# EAGLE board proiect 2025 v45 (EAGLE 9.7.0)
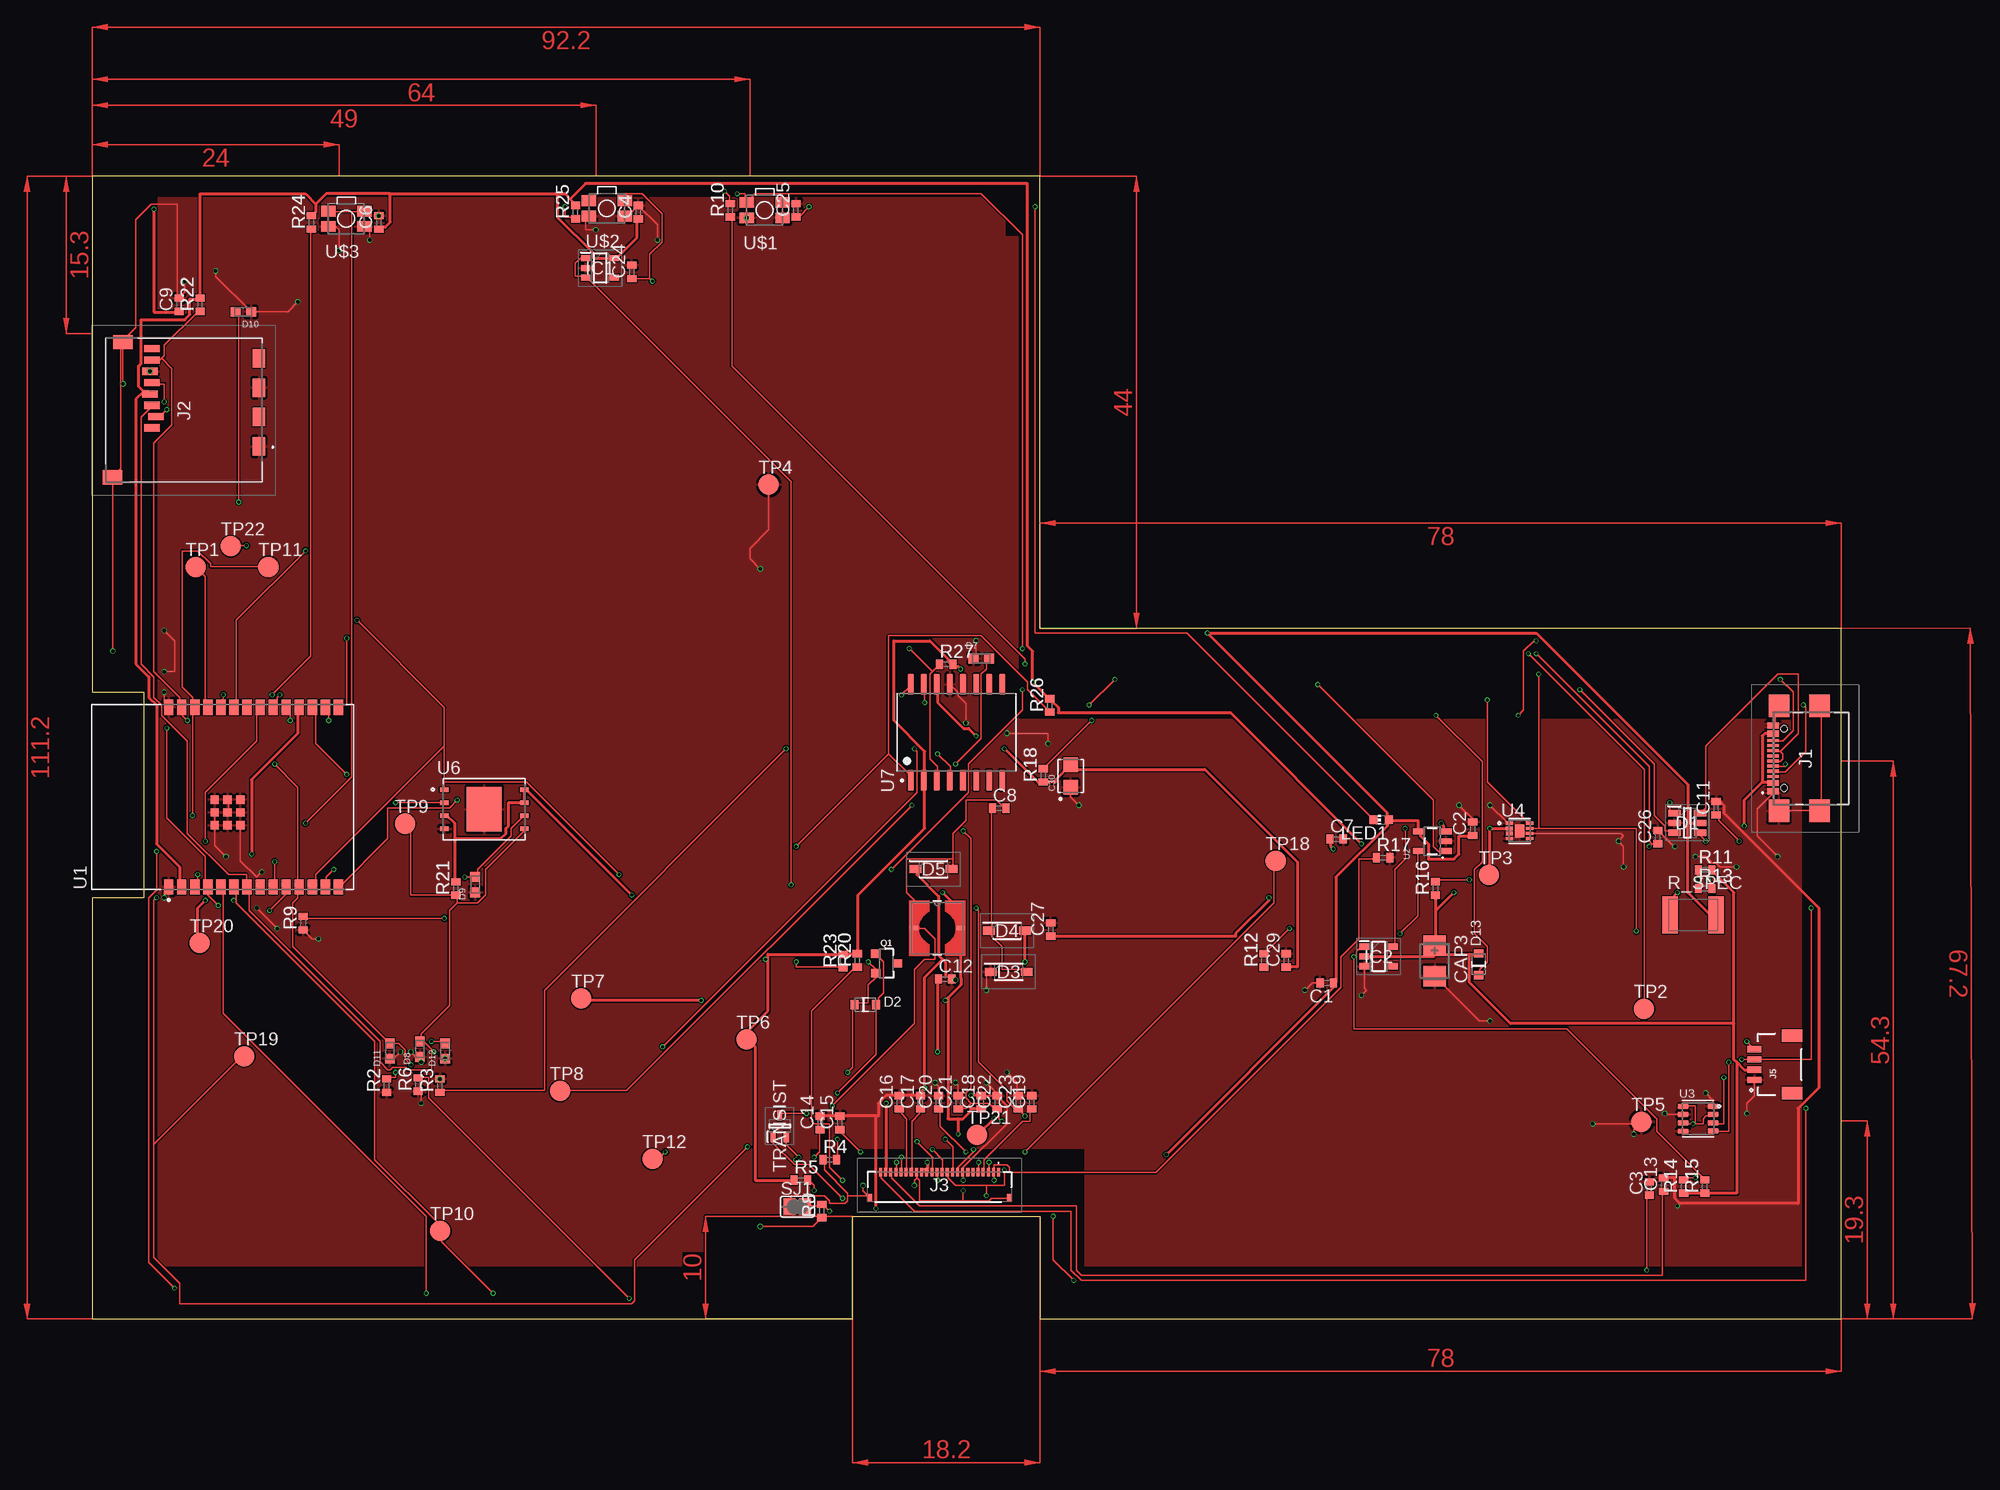
[diagram p0: board, top side]
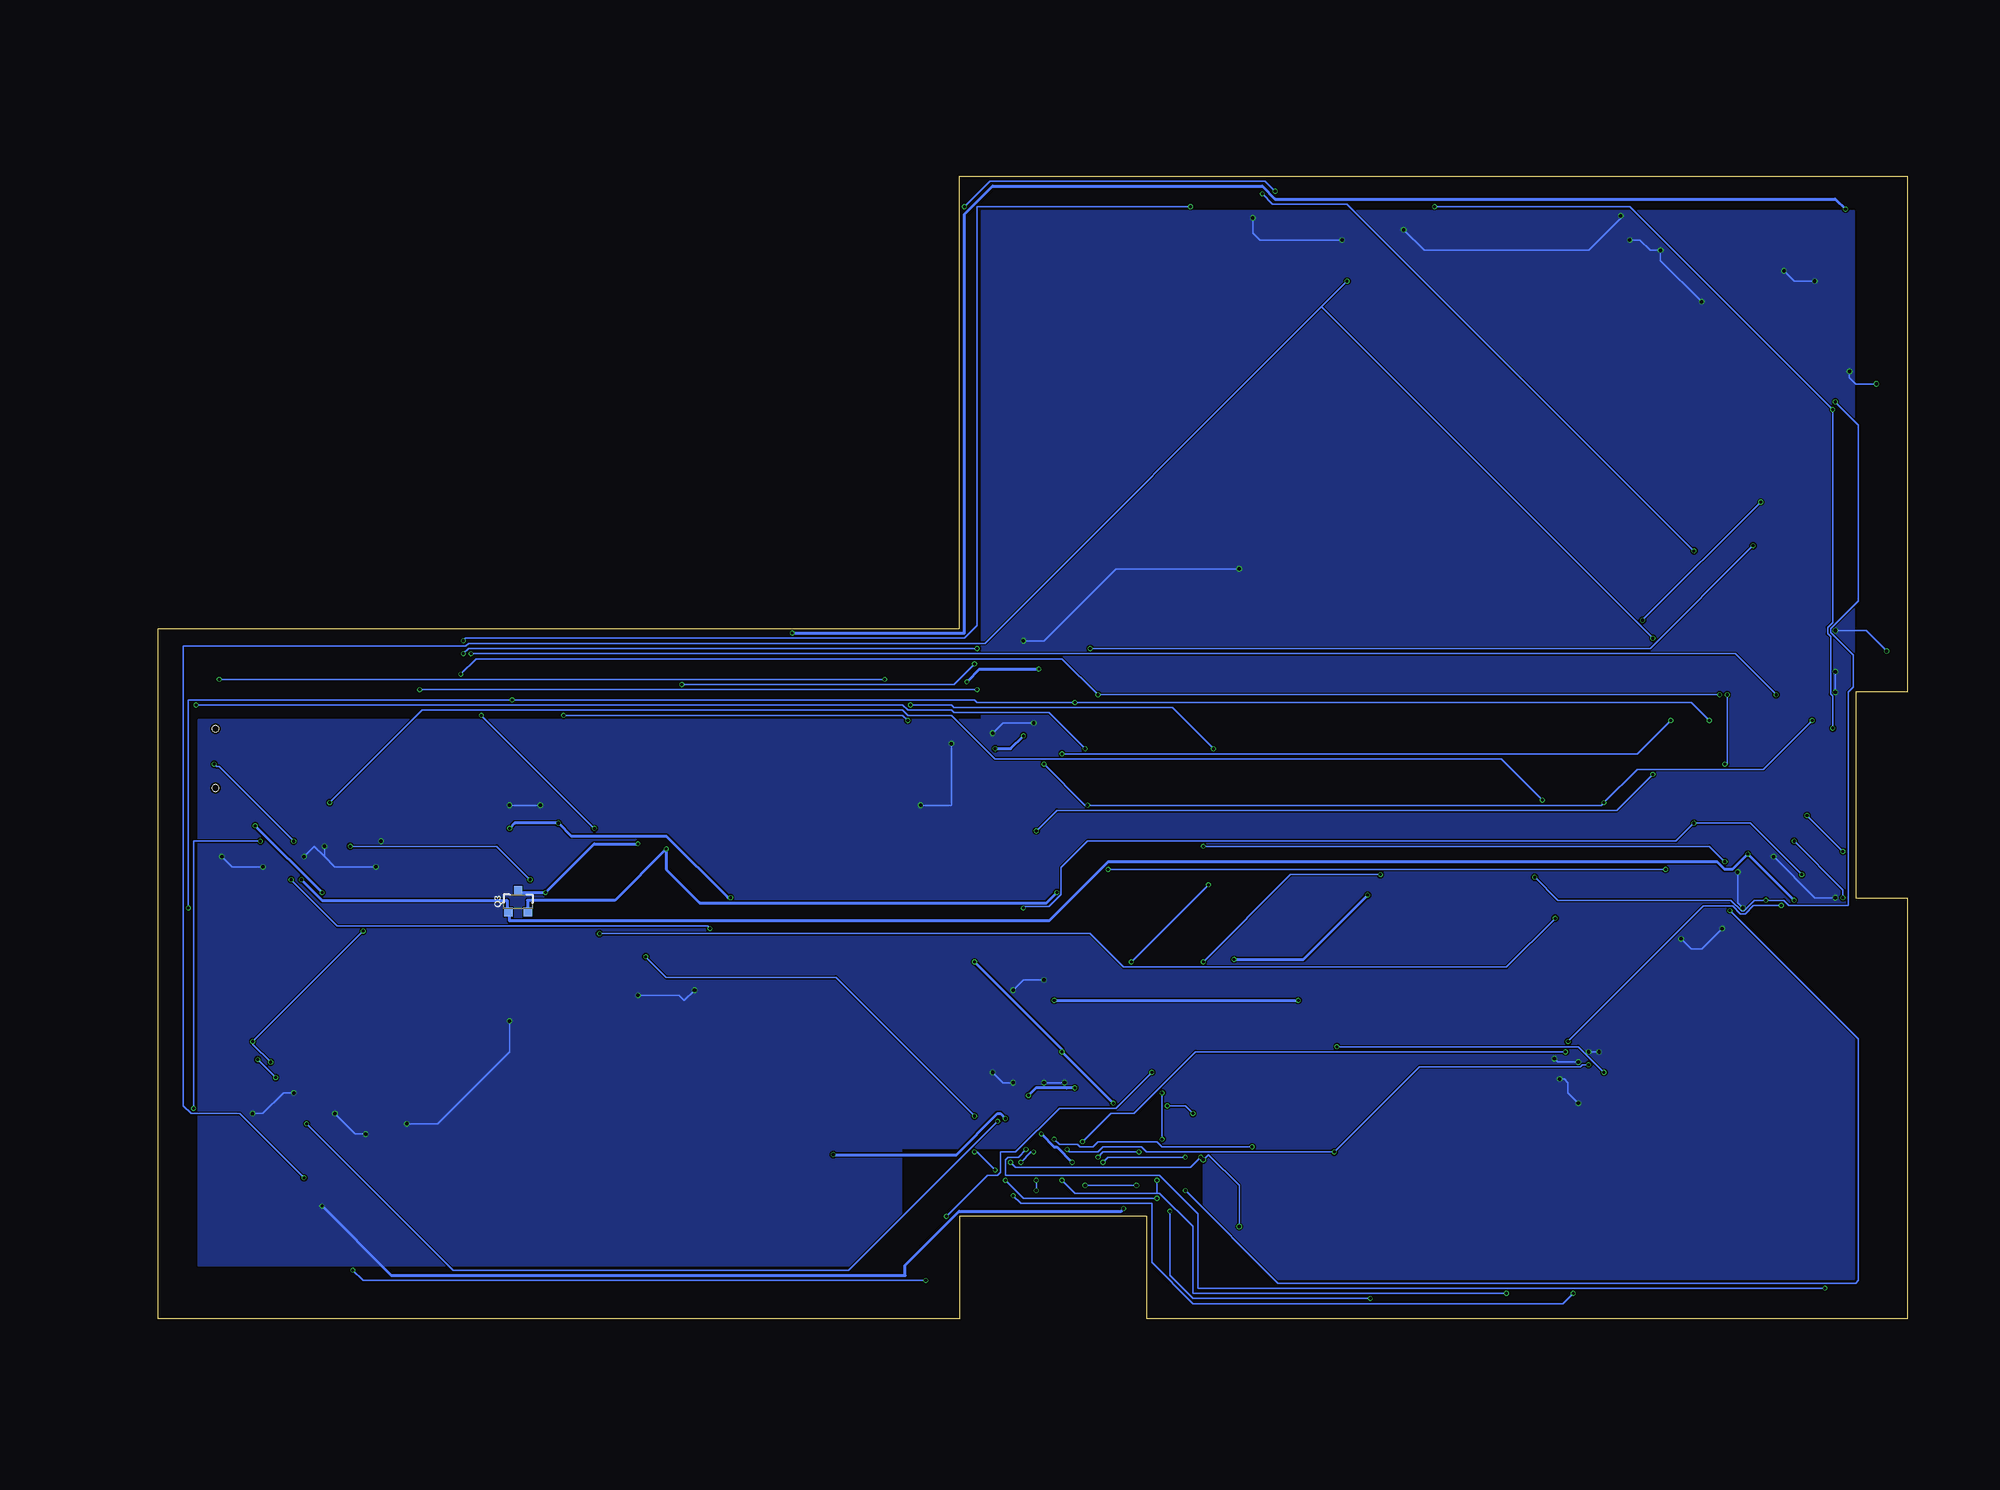
[diagram p1: board, bottom side, seen from below]

Size 170.2 x 111.2 mm. Coordinates in mm from the lower left corner, seen from the top.
Outline: 0,0 74,0 74,10 92.2,10 92.2,0 170.2,0 170.2,67.2 92.2,67.2 92.2,111.2 0,111.2 0,61 5,61 5,41 0,41 0,0
Copper layers (1*16): Top 0.035mm / dielectric 1.6mm / Bottom 0.035mm
Design rules "jlcpcb-2layers.dru": minimum track width 5mil, minimum drill 0.3mm, track to track 5mil, track to pad 5mil, pad to pad 5mil, via to via 5mil, smd to smd 5mil, copper to edge 0.2mm, drill to drill 6mil, minimum pad ring 10mil, minimum via ring 3mil, stop-mask expansion 4mil, vias tented up to drill 0mil, thermal gap 10mil
Net classes: 0 default: width 0.15 mm; 1 power: width 0.3 mm

## Footprints (pad centres in the part's own frame; a part is rotated, then mirrored left to right if it is on the bottom)
ESP32_WROVER_EAGLE-LTSPICE_C0402 = smd 0.7 x 0.9: 1 -0.65,0; 2 0.65,0
EAGLE-LTSPICE_C0402 = smd 0.7 x 0.9: 1 -0.65,0; 2 0.65,0
CAPCP3225X100N = smd 1.4 x 1.4: 1 -1.1,0; 2 1.1,0
RCL_CT3528 = smd 2 x 2.2: + -1.5,0; - 1.5,0
SOT95P280X145-6N = smd 1.2 x 0.6: 1 -1.25,0.95; 2 -1.25,0; 3 -1.25,-0.95; 4 1.25,-0.95; 5 1.25,0; 6 1.25,0.95
ESP32_WROVER_AVX---SD0805S020S1R0_AVX_SD0805S020S1R0_0 = smd 0.8 x 0.9: 1 -1.05,0; 2 1.05,0
SOD3716X135N = smd 1.15 x 0.8: 1 -1.75,0; 2 1.75,0
DIOC1608X36N = smd 0.97 x 0.94: 1 -0.75,0; 2 0.75,0
SOT95P280X120-5N = smd 0.9 x 0.6: 1 -1.4,0.95; 2 -1.4,0; 3 -1.4,-0.95; 4 1.4,-0.95; 5 1.4,0.95
SOT95P280X125-5N = smd 0.9 x 0.6: 1 -1.4,0.95; 2 -1.4,0; 3 -1.4,-0.95; 4 1.4,-0.95; 5 1.4,0.95
SAMACSYS_PARTS_USB4110GFA = smd 0.3 x 1.15: A1 -3.35,3.678; A4 -2.55,3.678; A5 -1.25,3.678; A6 -0.25,3.678; A7 0.25,3.678; A8 1.25,3.678; A9 2.55,3.678; A12 3.35,3.678; B1 3.05,3.678; B4 2.25,3.678; B5 1.75,3.678; B6 0.75,3.678; B7 -0.75,3.678; B8 -1.75,3.678; B9 -2.25,3.678; B12 -3.05,3.678 | smd 2.18 x 2: MP1 -5.11,-0.827; MP2 5.11,-0.827; MP3 -5.11,3.103; MP4 5.11,3.103 | hole 0.65: -2.89,2.603; 2.89,2.603
112ATAARR03ATTEND = smd 1.8 x 1.2: G1 10.6,10.4; G2 4.9,10.4; S1 7.75,10.4; S2 2.05,10.4 | smd 1.4 x 1.9: G3 13.6,-3.85; G4 0.45,-2.85 | smd 0.7 x 1.5: P1 8.8,0; P2 7.7,0.4; P3 6.6,0; P4 5.5,-0.2; P5 4.4,0; P6 3.3,-0.2; P7 2.2,0; P8 1.1,0
FH34SRJ24S05SH99 = smd 0.3 x 0.8: 1 5.75,1.45; 2 5.25,1.45; 3 4.75,1.45; 4 4.25,1.45; 5 3.75,1.45; 6 3.25,1.45; 7 2.75,1.45; 8 2.25,1.45; 9 1.75,1.45; 10 1.25,1.45; 11 0.75,1.45; 12 0.25,1.45; 13 -0.25,1.45; 14 -0.75,1.45; 15 -1.25,1.45; 16 -1.75,1.45; 17 -2.25,1.45; 18 -2.75,1.45; 19 -3.25,1.45; 20 -3.75,1.45; 21 -4.25,1.45; 22 -4.75,1.45; 23 -5.25,1.45; 24 -5.75,1.45 | smd 0.4 x 0.8: MP1 6.75,-1.05; MP2 -6.75,-1.05
JST04_1MM_RA = smd 0.6 x 1.35: 1 -1.5,0; 2 -0.5,0; 3 0.5,0; 4 1.5,0 | smd 1.2 x 2: NC1 2.8,-3.675; NC2 -2.8,-3.675
IND_4828-WE-TPC_WRE = smd 0.813 x 0.406: 1 -2.286,0; 2 2.286,0
ADAFRUIT_CHIP-LED0603 = smd 0.8 x 0.8: A 0,-0.75; C 0,0.75
ESP32_WROVER_SPARKFUN-DISCRETESEMI_SOT23-3 = smd 0.8 x 0.9: 1 -0.95,-1; 2 0.95,-1; 3 0,1.1
ESP32_WROVER_EAGLE-LTSPICE_R0402 = smd 0.7 x 0.9: 1 -0.65,0; 2 0.65,0
ESP32C6_VARISTOR_CT/CN1812 = smd 1.5 x 3.6: 1 -2.25,0; 2 2.25,0
SJ = smd 1.168 x 1.6: 1 -0.762,0; 2 0.762,0
TP20R = smd 2 x 2: TP 0,0
SOT65P210X110-3N = smd 1.05 x 0.5: 1 -1.05,0.65; 2 -1.05,-0.65; 3 1.05,0
XCVR_ESP32-C6-WROOM-1-N8 = smd 1.5 x 0.9: 1 -8.75,5.26; 2 -8.75,3.99; 3 -8.75,2.72; 4 -8.75,1.45; 5 -8.75,0.18; 6 -8.75,-1.09; 7 -8.75,-2.36; 8 -8.75,-3.63; 9 -8.75,-4.9; 10 -8.75,-6.17; 11 -8.75,-7.44; 12 -8.75,-8.71; 13 -8.75,-9.98; 14 -8.75,-11.25; 15 8.75,-11.25; 16 8.75,-9.98; 17 8.75,-8.71; 18 8.75,-7.44; 19 8.75,-6.17; 20 8.75,-4.9; 21 8.75,-3.63; 22 8.75,-2.36; 23 8.75,-1.09; 24 8.75,0.18; 25 8.75,1.45; 26 8.75,2.72; 27 8.75,3.99; 28 8.75,5.26 | smd 0.8 x 0.8: 29_1 -2.755,0.79; 29_2 -1.505,0.79; 29_3 -0.255,0.79; 29_4 -2.755,-0.46; 29_5 -1.505,-0.46; 29_6 -0.255,-0.46; 29_7 -2.755,-1.71; 29_8 -1.505,-1.71; 29_9 -0.255,-1.71
ESP32_WROVER_SPARKFUN-IC-POWER_SOT23-5 = smd 0.55 x 1.2: 1 -0.95,-1.3; 2 0,-1.3; 3 0.95,-1.3; 4 0.95,1.3; 5 -0.95,1.3
ESP32_WROVER_BME680_PSON80P300X300X100-8N = smd 1.016 x 0.5: 1 1.458,1.2; 2 1.458,0.4; 3 1.458,-0.4; 4 1.458,-1.2; 5 -1.458,-1.22; 6 -1.458,-0.4; 7 -1.458,0.4; 8 -1.458,1.2
SON50P200X200X80-9N = smd 0.76 x 0.27: 1 -0.985,0.75; 4 -0.985,-0.75; 5 0.985,-0.75; 6 0.985,-0.25; 7 0.985,0.25; 8 0.985,0.75 | smd 0.813 x 0.406: 2 -0.985,0.25; 3 -0.985,-0.25 | smd 0.9 x 1.3: 9 0,0
SON127P600X800X80-9N = smd 0.94 x 0.44: 1 -3.895,1.905; 2 -3.895,0.635; 3 -3.895,-0.635; 4 -3.895,-1.905; 5 3.895,-1.905; 6 3.895,-0.635; 7 3.895,0.635; 8 3.895,1.905 | smd 3.4 x 4.3: 9 0,0
SOIC127P1032X265-16N = smd 2.05 x 0.59: 1 -4.655,4.445; 2 -4.655,3.175; 3 -4.655,1.905; 4 -4.655,0.635; 5 -4.655,-0.635; 6 -4.655,-1.905; 7 -4.655,-3.175; 8 -4.655,-4.445; 9 4.655,-4.445; 10 4.655,-3.175; 11 4.655,-1.905; 12 4.655,-0.635; 13 4.655,0.635; 14 4.655,1.905; 15 4.655,3.175; 16 4.655,4.445
MYBUTTON = smd 1.4 x 1.05: 1 1.75,0.75; 2 -1.75,0.75; 3 -1.75,-0.75; 4 1.75,-0.75

## Placement (x,y rotation side)
C1  [ESP32_WROVER_EAGLE-LTSPICE_C0402]  120.12,32.71 180 top
C2  [ESP32_WROVER_EAGLE-LTSPICE_C0402]  134.31,47.71 90 top
C3  [ESP32_WROVER_EAGLE-LTSPICE_C0402]  151.5,12.71 90 top
C4  [ESP32_WROVER_EAGLE-LTSPICE_C0402]  53.12,107.71 90 top
C6  [ESP32_WROVER_EAGLE-LTSPICE_C0402]  27.88,106.71 90 top
C7  [ESP32_WROVER_EAGLE-LTSPICE_C0402]  121.07,46.71 0 top
C8  [ESP32_WROVER_EAGLE-LTSPICE_C0402]  88.26,49.71 0 top
C9  [ESP32_WROVER_EAGLE-LTSPICE_C0402]  8.45,98.71 90 top
C11  [ESP32_WROVER_EAGLE-LTSPICE_C0402]  158.01,49.71 90 top
C12  [ESP32_WROVER_EAGLE-LTSPICE_C0402]  82.98,33.09 0 top
C13  [ESP32_WROVER_EAGLE-LTSPICE_C0402]  152.9,13.09 90 top
C14  [ESP32_WROVER_EAGLE-LTSPICE_C0402]  70.82,19.09 90 top
C15  [ESP32_WROVER_EAGLE-LTSPICE_C0402]  72.74,19.09 90 top
C16  [ESP32_WROVER_EAGLE-LTSPICE_C0402]  78.53,21.09 90 top
C17  [ESP32_WROVER_EAGLE-LTSPICE_C0402]  80.58,21.09 90 top
C18  [ESP32_WROVER_EAGLE-LTSPICE_C0402]  86.5,21.09 90 top
C19  [ESP32_WROVER_EAGLE-LTSPICE_C0402]  91.42,21.09 90 top
C20  [ESP32_WROVER_EAGLE-LTSPICE_C0402]  82.34,21.09 90 top
C21  [ESP32_WROVER_EAGLE-LTSPICE_C0402]  84.26,21.09 90 top
C22  [ESP32_WROVER_EAGLE-LTSPICE_C0402]  88.05,21.09 90 top
C23  [EAGLE-LTSPICE_C0402]  90.1,21.09 90 top
C24  [EAGLE-LTSPICE_C0402]  52.49,101.9 90 top
C25  [ESP32_WROVER_EAGLE-LTSPICE_C0402]  68.47,107.9 90 top
C26  [EAGLE-LTSPICE_C0402]  152.33,46.9 90 top
C27  [ESP32_WROVER_EAGLE-LTSPICE_C0402]  93.25,37.9 90 top
C29  [ESP32_WROVER_EAGLE-LTSPICE_C0402]  116.17,34.9 90 top
C30  CPH3225A  [CAPCP3225X100N]  95.2,52.85 90 top
CAP3  [RCL_CT3528]  130.63,34.85 270 top
D1  USBLC6-2SC6Y  [SOT95P280X145-6N]  155.2,48.28 0 top
D2  ESP32_WROVER_AVX---SD0805S020S1R0_AVX_SD0805S020S1R0_0_0AVX_SD0805S020S1R0_0_0  [ESP32_WROVER_AVX---SD0805S020S1R0_AVX_SD0805S020S1R0_0]  75.22,30.6 0 top
D3  MBR0530  [SOD3716X135N]  89.17,33.79 0 top
D4  MBR0530  [SOD3716X135N]  89.01,37.79 0 top
D5  MBR0530  [SOD3716X135N]  81.85,43.79 0 top
D7  PGB1010603MR  [DIOC1608X36N]  86.5,64.28 0 top
D8  PGB1010603MR  [DIOC1608X36N]  31.88,26.28 90 top
D9  PGB1010603MR  [DIOC1608X36N]  37.26,42.28 90 top
D10  PGB1010603MR  [DIOC1608X36N]  14.7,98.01 180 top
D11  PGB1010603MR  [DIOC1608X36N]  28.95,26.09 90 top
D12  PGB1010603MR  [DIOC1608X36N]  34.33,26.09 90 top
D13  ESP32_WROVER_AVX---SD0805S020S1R0_AVX_SD0805S020S1R0_0_0AVX_SD0805S020S1R0_0_0  [ESP32_WROVER_AVX---SD0805S020S1R0_AVX_SD0805S020S1R0_0]  134.91,34.52 90 top
IC1  XC6220A331MR-G  [SOT95P280X120-5N]  49.41,102.28 0 top
IC2  BD5229G-TR  [SOT95P280X125-5N]  125.17,35.28 0 top
J1  SAMACSYS_PARTS_USB4110-GF-A  [SAMACSYS_PARTS_USB4110GFA]  167.23,54.56 90 top
J2  112A-TAAR-R03_ATTEND  [112ATAARR03ATTEND]  5.82,95.52 270 top
J3  FH34SRJ-24S-0.5SH_99_  [FH34SRJ24S05SH99]  82.44,12.85 0 top
J5  QWIIC_RIGHT_ANGLE  [JST04_1MM_RA]  161.72,24.77 90 top
L1  744043680IND_4828-WE-TPC_WRE  [IND_4828-WE-TPC_WRE]  82.23,38.05 0 top
LED1  [ADAFRUIT_CHIP-LED0603]  125.41,48.58 90 top
Q1  20V/4.2A/52mΩ/1.4W  [ESP32_WROVER_SPARKFUN-DISCRETESEMI_SOT23-3]  77.25,34.61 270 top
Q3  20V/4.2A/52mΩ/1.4W  [ESP32_WROVER_SPARKFUN-DISCRETESEMI_SOT23-3]  135.17,40.61 0 bottom
R2  [ESP32_WROVER_EAGLE-LTSPICE_R0402]  28.64,22.71 90 top
R3  [ESP32_WROVER_EAGLE-LTSPICE_R0402]  33.83,22.71 90 top
R4  [ESP32_WROVER_EAGLE-LTSPICE_R0402]  71.76,15.52 0 top
R5  [ESP32_WROVER_EAGLE-LTSPICE_R0402]  68.95,13.52 0 top
R6  [ESP32_WROVER_EAGLE-LTSPICE_R0402]  31.7,22.82 90 top
R8  [ESP32_WROVER_EAGLE-LTSPICE_R0402]  70.98,10.52 90 top
R9  [ESP32_WROVER_EAGLE-LTSPICE_R0402]  20.52,38.52 90 top
R10  [ESP32_WROVER_EAGLE-LTSPICE_R0402]  62.09,107.9 90 top
R11  [ESP32_WROVER_EAGLE-LTSPICE_R0402]  156.93,43.71 0 top
R12  [ESP32_WROVER_EAGLE-LTSPICE_R0402]  114.01,34.9 90 top
R13  [ESP32_WROVER_EAGLE-LTSPICE_R0402]  156.93,41.9 0 top
R14  [ESP32_WROVER_EAGLE-LTSPICE_R0402]  154.85,12.9 90 top
R15  [ESP32_WROVER_EAGLE-LTSPICE_R0402]  156.9,12.9 90 top
R16  [ESP32_WROVER_EAGLE-LTSPICE_R0402]  130.69,41.9 90 top
R17  [ESP32_WROVER_EAGLE-LTSPICE_R0402]  125.61,44.9 0 top
R18  [ESP32_WROVER_EAGLE-LTSPICE_R0402]  92.53,52.9 90 top
R20  [ESP32_WROVER_EAGLE-LTSPICE_R0402]  74.45,34.9 90 top
R21  [ESP32_WROVER_EAGLE-LTSPICE_R0402]  35.37,41.89 90 top
R22  [ESP32_WROVER_EAGLE-LTSPICE_R0402]  10.49,98.71 90 top
R23  [ESP32_WROVER_EAGLE-LTSPICE_R0402]  73.05,34.82 90 top
R24  [ESP32_WROVER_EAGLE-LTSPICE_R0402]  21.33,106.71 90 top
R25  [ESP32_WROVER_EAGLE-LTSPICE_R0402]  47.02,107.71 90 top
R26  [ESP32_WROVER_EAGLE-LTSPICE_R0402]  93.17,59.71 90 top
R27  [ESP32_WROVER_EAGLE-LTSPICE_R0402]  83.09,63.71 0 top
R_SPEC  ESP32C6_VARISTORCN1812  [ESP32C6_VARISTOR_CT/CN1812]  155.77,39.34 0 top
SJ1  [SJ]  68.61,10.93 0 top
TP1  TPTP20R  [TP20R]  10.06,73.2 0 top
TP2  TPTP20R  [TP20R]  150.98,30.2 0 top
TP3  TPTP20R  [TP20R]  135.9,43.2 0 top
TP4  TPTP20R  [TP20R]  65.82,81.2 0 top
TP5  TPTP20R  [TP20R]  150.74,19.2 0 top
TP6  TPTP20R  [TP20R]  63.66,27.2 0 top
TP7  TPTP20R  [TP20R]  47.58,31.2 0 top
TP8  TPTP20R  [TP20R]  45.5,22.2 0 top
TP9  TPTP20R  [TP20R]  30.42,48.2 0 top
TP10  TPTP20R  [TP20R]  33.85,8.58 0 top
TP11  TPTP20R  [TP20R]  17.14,73.2 0 top
TP12  TPTP20R  [TP20R]  54.5,15.58 0 top
TP18  TPTP20R  [TP20R]  115.15,44.58 0 top
TP19  TPTP20R  [TP20R]  14.8,25.58 0 top
TP20  TPTP20R  [TP20R]  10.45,36.58 0 top
TP21  TPTP20R  [TP20R]  86.1,17.94 0 top
TP22  TPTP20R  [TP20R]  13.49,75.2 0 top
TRANSIST  SI1308EDL-T1-GE3  [SOT65P210X110-3N]  66.88,18.79 90 top
U1  ESP32-C6-WROOM-1-N8  [XCVR_ESP32-C6-WROOM-1-N8]  12.7,50.8 90 top
U2  ESP32_WROVER_SPARKFUN-IC-POWER_MCP73831  [ESP32_WROVER_SPARKFUN-IC-POWER_SOT23-5]  130.39,46.5 90 top
U3  ESP32_WROVER_BME680_BME680  [ESP32_WROVER_BME680_PSON80P300X300X100-8N]  156.25,19.5 0 top
U4  MAX17048G+T10  [SON50P200X200X80-9N]  138.88,47.5 0 top
U6  W25Q512JVEIQ  [SON127P600X800X80-9N]  38.14,49.61 0 top
U7  DS3231SN#  [SOIC127P1032X265-16N]  84.09,57.1 90 top
U$1  BUTTON_CUSYOMV1  [MYBUTTON]  65.42,107.91 180 top
U$2  BUTTON_CUSYOMV1  [MYBUTTON]  50.07,108.07 180 top
U$3  BUTTON_CUSYOMV1  [MYBUTTON]  24.72,107.07 180 top

## Library data of the parts
C1-C4 C6-C9 C11-C27 C29 = DeskAssistant_v19_v1; SPICEMODEL: NONE; SPICEPREFIX: C
C30 = DeskAssistant_v19_v1; AVAILABILITY: Not in stock; CHECK_PRICES: https://www.snapeda.com/parts/CPH3225A/Seiko+Instruments/view-part/?ref=eda; DESCRIPTION: 11 mF (EDLC) Supercapacitor 3.3 V 1210 (3225 Metric) - -; MF: Seiko Instruments; MP: CPH3225A; PACKAGE: 1210 Seiko; PRICE: None; PURCHASE-URL: https://www.snapeda.com/api/url_track_click_mouser/?unipart_id=562593&manufacturer=Seiko Instruments&part_name=CPH3225A&search_term=None; SNAPEDA_LINK: https://www.snapeda.com/parts/CPH3225A/Seiko+Instruments/view-part/?ref=snap
CAP3 = DeskAssistant_v19_v1; SPICEPREFIX: C
D1 = DeskAssistant_v19_v1; AVAILABILITY: In Stock; CHECK_PRICES: https://www.snapeda.com/parts/USBLC6-2SC6Y/STMicroelectronics/view-part/?ref=eda; DESCRIPTION: 17V Clamp 5A (8/20µs) Ipp Tvs Diode Surface Mount SOT-23-6; MF: STMicroelectronics; MP: USBLC6-2SC6Y; PACKAGE: SOT-23-6 STMicroelectronics; PRICE: None; SNAPEDA_LINK: https://www.snapeda.com/parts/USBLC6-2SC6Y/STMicroelectronics/view-part/?ref=snap
D2 D13 = DeskAssistant_v19_v1; CENTROID_NOT_SPECIFIED: No; DATASHEET: http://datasheets.avx.com/schottky.pdf; DIGIKEY_DESCRIPTION: DIODE SCHOTTKY 20V 1A 0805; DIGIKEY_PART_NUMBER: 478-7800-1-ND; LEAD_FREE: yes; MF: AVX; MOUSER_PART_NUMBER: 581-SD0805S020S1R0; PACKAGE: 0805 (2012 metric); PREFIX: D; ROHS: yes; TEMPERATURE_RANGE_HIGH: +125°C; TEMPERATURE_RANGE_LOW: -55°C
D3-D5 = DeskAssistant_v19_v1; AVAILABILITY: In Stock; CHECK_PRICES: https://www.snapeda.com/parts/MBR0530/Onsemi/view-part/?ref=eda; DESCRIPTION: Diode Schottky 30 V 500mA Surface Mount SOD-123; MF: ON Semiconductor; MP: MBR0530; PACKAGE: SOD-123-2 ON Semiconductor; PRICE: None; PURCHASE-URL: https://www.snapeda.com/api/url_track_click_mouser/?unipart_id=179458&manufacturer=ON Semiconductor&part_name=MBR0530&search_term=None; SNAPEDA_LINK: https://www.snapeda.com/parts/MBR0530/Onsemi/view-part/?ref=snap
D7-D12 = DeskAssistant_v19_v1; AVAILABILITY: In Stock; CHECK_PRICES: https://www.snapeda.com/parts/PGB1010603MR/Littelfuse/view-part/?ref=eda; DESCRIPTION: 150V (Typ) Clamp - Ipp Tvs Diode Surface Mount 0603 (1608 Metric); MF: Littelfuse Inc.; MP: PGB1010603MR; PACKAGE: 0603 Littelfuse Inc.; PRICE: None; PURCHASE-URL: https://www.snapeda.com/api/url_track_click_mouser/?unipart_id=5659453&manufacturer=Littelfuse Inc.&part_name=PGB1010603MR&search_term=None; SNAPEDA_LINK: https://www.snapeda.com/parts/PGB1010603MR/Littelfuse/view-part/?ref=snap
IC1 = DeskAssistant_v19_v1; DESCRIPTION: LDO Voltage Regulators; HEIGHT: 1.2mm; MANUFACTURER_NAME: Torex; MANUFACTURER_PART_NUMBER: XC6220A331MR-G; MOUSER_PART_NUMBER: 865-XC6220A331MR-G; MOUSER_PRICE-STOCK: https://www.mouser.co.uk/ProductDetail/Torex-Semiconductor/XC6220A331MR-G?qs=AsjdqWjXhJ8ZSWznL1J0gg%3D%3D
IC2 = DeskAssistant_v19_v1; DESCRIPTION: Voltage Detector with Adjustable Delay Time: CMOS processes are utilized to develop high precision, low current consumption CMOS reset ICs that allow arbitrary setting of the delay time. The extensive lineup includes both Nch Open Drain and CMOS output types in a wide range of detection voltages (from 2.3V to 6.0V, in 0.1V steps), enabling selection of the ideal solution based on customer requirements. In addition, the entire series is of course both lead-free and RoHS-compliant.; HEIGHT: 1.25mm; MANUFACTURER_NAME: ROHM Semiconductor; MANUFACTURER_PART_NUMBER: BD5229G-TR; MOUSER_PART_NUMBER: 755-BD5229G-TR; MOUSER_PRICE-STOCK: https://www.mouser.co.uk/ProductDetail/ROHM-Semiconductor/BD5229G-TR?qs=4kLU8WoGk0vvnhrrYwdszw%3D%3D
J1 = DeskAssistant_v19_v1; DESCRIPTION: CONN USB 2.0 TYPE-C R/A SMT; HEIGHT: 3.26mm; MANUFACTURER_NAME: GCT (GLOBAL CONNECTOR TECHNOLOGY); MANUFACTURER_PART_NUMBER: USB4110-GF-A; MOUSER_PART_NUMBER: 640-USB4110-GF-A; MOUSER_PRICE-STOCK: https://www.mouser.co.uk/ProductDetail/GCT/USB4110-GF-A?qs=KUoIvG%2F9IlYiZvIXQjyJeA%3D%3D
J2 = DeskAssistant_v19_v1; DESCRIPTION: Micro SD Card Socket, Push-Push Type, Top Mount, SMT, H=1.83mm, 10u; HEIGHT: 1.9mm; MANUFACTURER_NAME: ATTEND; MANUFACTURER_PART_NUMBER: 112A-TAAR-R03 ATTEND
J3 = DeskAssistant_v19_v1; DESCRIPTION: 24 Position FFC, FPC Connector Contacts, Top and Bottom 0.020" (0.50mm) Surface Mount, Right Angle; HEIGHT: 1.1mm; MANUFACTURER_NAME: Hirose; MANUFACTURER_PART_NUMBER: FH34SRJ-24S-0.5SH(99); MOUSER_PART_NUMBER: 798-FH34SRJ24S05SH99; MOUSER_PRICE-STOCK: https://www.mouser.co.uk/ProductDetail/Hirose-Connector/FH34SRJ-24S-0.5SH99?qs=vcbW%252B4%252BSTIpKBl5ap9J8Fw%3D%3D
J5 = DeskAssistant_v19_v1; PROD_ID: CONN-13694
L1 = DeskAssistant_v19_v1; COPYRIGHT: Copyright (C) 2024 Ultra Librarian. All rights reserved.; MANUFACTURER_PART_NUMBER: 744043680; MFR_NAME: Wurth Electronics
LED1 R_SPEC SJ1 TP1-TP12 TP18-TP22 U$1-U$3 = DeskAssistant_v19_v1
Q1 Q3 = DeskAssistant_v19_v1; PROD_ID: TRAN-14388
R2-R6 R8-R18 R20-R27 = DeskAssistant_v19_v1; SPICEMODEL: NONE; SPICEPREFIX: R
TRANSIST = DeskAssistant_v19_v1; AVAILABILITY: In Stock; CHECK_PRICES: https://www.snapeda.com/parts/SI1308EDL-T1-GE3/Vishay+Siliconix/view-part/?ref=eda; DESCRIPTION: Si1308EDL-T1-GE3 N-channel MOSFET Transistor, 1.5 A, 30 V, 3-Pin SC-70 | Siliconix / Vishay SI1308EDL-T1-GE3; MF: Vishay Siliconix; MP: SI1308EDL-T1-GE3; PACKAGE: SOT-323 Vishay Semiconductor; PRICE: None; PURCHASE-URL: https://www.snapeda.com/api/url_track_click_mouser/?unipart_id=274603&manufacturer=Vishay Siliconix&part_name=SI1308EDL-T1-GE3&search_term=None; SNAPEDA_LINK: https://www.snapeda.com/parts/SI1308EDL-T1-GE3/Vishay+Siliconix/view-part/?ref=snap
U1 = DeskAssistant_v19_v1; AVAILABILITY: In Stock; CHECK_PRICES: https://www.snapeda.com/parts/ESP32-C6-WROOM-1-N8/Espressif+Systems/view-part/?ref=eda; DESCRIPTION: Multiprotocol Modules ESP32-C6 module, Wi-Fi 6 in 2.4 GHz band, Bluetooth 5, Zigbee 3.0 and Thread. ESP34-WROOM Compatible - ENGINEERING SAMPLE; MF: Espressif Systems; MP: ESP32-C6-WROOM-1-N8; PACKAGE: None; PRICE: None; SNAPEDA_LINK: https://www.snapeda.com/parts/ESP32-C6-WROOM-1-N8/Espressif+Systems/view-part/?ref=snap
U2 = DeskAssistant_v19_v1; PROD_ID: IC-09995
U3 = DeskAssistant_v19_v1; AVAILABILITY: Unavailable; DESCRIPTION: Integrated Environmental Unit; MF: Bosch Sensortec; MP: BME680; PACKAGE: LGA-8 Bosch Tools; PRICE: None
U4 = DeskAssistant_v19_v1; AVAILABILITY: In Stock; CHECK_PRICES: https://www.snapeda.com/parts/MAX17048G+T10/Analog+Devices/view-part/?ref=eda; DESCRIPTION: 3µA 1-Cell/2-Cell Fuel Gauge with ModelGauge; MF: Analog Devices; MP: MAX17048G+T10; PACKAGE: TDFN-8 Maxim; PRICE: None; PURCHASE-URL: https://www.snapeda.com/api/url_track_click_mouser/?unipart_id=329239&manufacturer=Analog Devices&part_name=MAX17048G+T10&search_term=None; SNAPEDA_LINK: https://www.snapeda.com/parts/MAX17048G+T10/Analog+Devices/view-part/?ref=snap
U6 = DeskAssistant_v19_v1; AVAILABILITY: In Stock; CHECK_PRICES: https://www.snapeda.com/parts/W25Q512JVEIQ/Winbond+Electronics/view-part/?ref=eda; DESCRIPTION: FLASH - NOR Memory IC 512Mb (64M x 8) SPI - Quad I/O 133 MHz 8-WSON (8x6); MF: Winbond Electronics; MP: W25Q512JVEIQ; PACKAGE: Package; PRICE: None; SNAPEDA_LINK: https://www.snapeda.com/parts/W25Q512JVEIQ/Winbond+Electronics/view-part/?ref=snap
U7 = DeskAssistant_v19_v1; AVAILABILITY: In Stock; CHECK_PRICES: https://www.snapeda.com/parts/DS3231SN%23/Analog+Devices/view-part/?ref=eda; DESCRIPTION: Extremely Accurate I²C-Integrated RTC/TCXO/Crystal; MF: Analog Devices; MP: DS3231SN#; PACKAGE: SOIC-16 Maxim; PRICE: None; PURCHASE-URL: https://www.snapeda.com/api/url_track_click_mouser/?unipart_id=99048&manufacturer=Analog Devices&part_name=DS3231SN#&search_term=None; SNAPEDA_LINK: https://www.snapeda.com/parts/DS3231SN%23/Analog+Devices/view-part/?ref=snap

## Nets
3V3 [power]: C4.1 C6.1 CAP3.+ D13.2 IC1.5 IC2.2 J2.P4 J5.2 Q3.3 R5.1 R11.2 R14.1 R15.1 R16.1 R20.2 R21.2 R22.2 R23.2 R24.2 R25.2 R26.2 R27.2 TP6.TP U1.2 U6.3 U6.7 U6.8 U7.2
32KHZ: R26.1 U1.9 U7.1
DN: D1.4 J1.B7
DP: D1.6 J1.A6 J1.B6
EPD_3V3 [power]: C7.1 C18.1 J3.15 J3.16 L1.2 Q3.2 TP7.TP
EPD_3V3_C [power]: Q3.1 R11.1 TP20.TP U1.18
EPD_BUSY: J3.9 TP11.TP U1.26
EPD_CS: D11.2 J3.12 R24.1 TP12.TP U1.11
EPD_DC: J3.11 TP18.TP U1.5
EPD_RST: J3.10 TP19.TP U1.21
FLASH_CS: D10.2 R23.1 U1.12 U6.1
GDR: J3.2 R17.1 TRANSIST.1
GND: C1.2 C2.2 C3.2 C4.2 C6.2 C7.2 C9.2 C11.2 C12.2 C13.2 C14.2 C15.2 C16.2 C17.2 C18.2 C19.2 C20.2 C21.2 C22.2 C23.2 C24.2 C25.2 C26.2 C27.2 C29.2 C30.1 CAP3.- D1.2 D3.1 D7.1 D8.1 D9.1 D10.1 D11.1 D12.1 IC1.2 IC2.3 J1.A1 J1.A12 J1.B1 J1.B12 J1.MP1 J1.MP2 J1.MP3 J1.MP4 J2.G1 J2.G2 J2.G3 J2.G4 J2.P6 J3.8 J3.17 J3.MP1 J3.MP2 J5.1 R2.1 R3.2 R4.1 R6.1 R9.1 R17.2 SJ1.1 TP4.TP TP5.TP U1.1 U1.28 U1.29_1 U1.29_2 U1.29_3 U1.29_4 U1.29_5 U1.29_6 U1.29_7 U1.29_8 U1.29_9 U2.2 U3.1 U3.5 U3.7 U4.1 U4.4 U4.6 U4.9 U6.4 U6.9 U7.13 U$1.1 U$1.2 U$2.1 U$2.2 U$3.1 U$3.2
GPIO8: R5.2 U1.10
I2C_PW: C21.1 C22.1 U1.17 U3.2 U3.6 U3.8
INT_RC: U1.8
INT_RTC: R27.1 TP22.TP U7.3
IO/BOOT: C24.1 R14.2 U1.15 U$2.3 U$2.4
IO/CHANGE: C26.1 R16.2 U1.23 U$1.3 U$1.4
MISO: D7.2 J2.P7 R22.1 TP8.TP U1.27 U6.2
MOSI: D8.2 J2.P3 J3.14 R21.1 TP9.TP U1.7 U6.5
N$1: J1.B5 R3.1
N$2: J1.A5 R2.2
N$3: C8.1 D3.2 D4.1
N$10: J1.A7
N$11: D2.2 Q1.1 R4.2
N$12: Q1.3
N$13: C3.1 D2.1 IC1.1 IC1.3 Q1.2
N$22: C25.1 IC2.5
N$23: LED1.C R10.2
N$24: R10.1 U2.1
N$25: R9.2 U2.5
N$26: R12.2 R13.2
N$28: C20.1 J3.5
N$29: C11.1 J3.24
N$30: C19.1 J3.4
N$32: C13.1 J3.22
N$33: R12.1
N$34: R13.1
N$40: D13.1 R18.2
N$41: C14.1 J3.21
N$42: C15.1 J3.20
N$43: C16.1 J3.19
N$44: C17.1 J3.18
PREVGH [power]: D5.1
PREVGL [power]: C12.1 D4.2 J3.23
RESE: J3.3 R8.1 TRANSIST.2
RESE': R6.2 R8.2 SJ1.2
RESET: C23.1 IC2.1 R15.2 U1.3 U$3.3 U$3.4
RTC_RST: U1.16 U7.4
RX: TP2.TP U1.24
SCK: D9.2 J2.P5 J3.13 R20.1 TP10.TP U1.6 U6.6
SCL: J5.4 U1.20 U3.4 U4.7 U7.16
SDA: J5.3 U1.19 U3.3 U4.8 U7.15
SRC: C8.2 D5.2 L1.1 TRANSIST.3
SS_SD: D12.2 J2.P2 R25.1 U1.4
TX: TP1.TP U1.25
USB_D+: D1.1 U1.14
USB_D-: D1.3 U1.13
VBAT [power]: C27.1 TP3.TP U2.3 U4.2 U4.3
VBUS [power]: C1.1 C2.1 C9.1 D1.5 LED1.A R_SPEC.2 TP21.TP U2.4
VRTC [power]: C29.1 C30.2 R18.1 U7.14
VUSB [power]: J1.A4 J1.A9 J1.B4 J1.B9 R_SPEC.1

## Tracks (layer width: path | path; a pad name or v marks a point on that pad's centre or on a via)
3V3  (via drill 0.3)
  Top 0.3: C4.1 53,107 53,105.25 51,103.25 IC1.5 50.75,103.25 48.75,103.25 48.75,103.75 45.25,107.25 45.25,109.5 | 21.75,108.5 21.75,107.75 21.5,107.5 R24.2 | 21.75,108.5 22.75,109.5 29,109.5 | 29,109.5 29,106.75 28.5,106.25 28,106.25 C6.1 | 46.5,109 46,109.5 45.25,109.5 | 46.5,109 47,108.5 R25.2 | 29,109.5 45.25,109.5 | 5,90.25 4.5,90.75 4.5,92.75 4.75,93 4.75,97.25 9,97.25 9.5,97.75 9.5,99.25 10.25,99.25 R22.2 10.5,99.5 10.5,109.5 20.75,109.5 21.75,108.5 | 5,90.25 5.5,90.25 J2.P4 5,90.25 | 5,90.25 4.25,89.5 4.25,63.75 5.5,62.5 5.5,60.5 6.25,59.75 6.25,46.25 8.5,44 8.5,42.25 U1.2 | 130.5,35.5 130.5,36.25 CAP3.+ | 130.5,35.5 130.5,35.25 124,35.25 IC2.2 | 130.75,39.75 130.75,36.5 CAP3.+ | 130.75,39.75 130.75,41.25 R16.1 | 130.5,35.5 134,35.5 | 134,35.5 134.75,35.5 D13.2 | 130.5,35.5 CAP3.+ | 130.75,39.75 v132.5,41.5 | R14.1 R15.1 160,12.25 160,25 | 159.75,28.75 159.75,25.25 160,25 | 159.75,28.75 159.75,41.5 157.75,43.5 R11.2 | 160,25 160.75,24.25 161.5,24.25 J5.2 | 134,35.5 134,32.75 138,28.75 159.75,28.75 | v84.5,63.25 84.25,63.5 83.75,63.5 R27.2 83.5,63.75 83.25,64 83.25,64.25 81.5,66 78,66 78,58.25 81,55.25 81,52.5 U7.2 81,52.25 81,47.75 74.5,41.25 74.5,35.75 R20.2 74.25,35.5 73.25,35.5 R23.2 73,35.5 65.75,35.5 65.75,35 | 42,50.25 42,51.5 U6.8 42.25,51.5 v52.5,41.25 | 35.25,46.75 35.25,48.25 34.5,49 34.25,49 U6.3 | 35.25,46.75 35.25,42.75 R21.2 | 42,50.25 40.5,50.25 40.5,48 40.25,47.75 40.25,47.25 39.75,46.75 35.25,46.75 | 42,50.25 U6.7 | 63.75,27.25 64.5,26.5 64.5,13.5 68.25,13.5 R5.1 | 65.75,35 65.75,30 63.75,28 63.75,27.25 | 63.75,27.25 TP6.TP | 65.75,35 v65.5,35 | v123.5,46.25 110.75,59 94,59 94,59.5 93.25,60.25 R26.2 93,60.5 v91.5,62 91.5,65 91,65.5 91,110.5 48,110.5 46.5,109
  Bottom 0.3: Q3.3 135,41.5 v132.5,41.5 127.75,46.25 v123.5,46.25 | v91.5,62 90.25,63.25 v84.5,63.25 | v52.5,41.25 58.75,35 v65.5,35
32KHZ  (via drill 0.3)
  Top 0.15: 77.5,55 77.5,66.5 86.5,66.5 91,62 91,61.25 93,59.25 R26.1 | 77.5,55 79.5,53 79.5,52.5 U7.1 | v17.75,44.5 17.75,42.25 U1.9 | 77.5,55 v68.5,46
  Bottom 0.15: v17.75,44.5 19.25,46 v68.5,46
DN  (via drill 0.3)
  Top 0.15: v164.75,54 164.75,53.75 163.75,53.75 J1.B7 | v157,46.5 156.5,47 156.5,47.25 D1.4
  Bottom 0.15: v164.75,54 164.5,53.75 164.25,53.75 v157,46.5
DP
  Top 0.15: 164.25,55.25 164.5,55 164.5,54.5 164.25,54.25 163.75,54.25 J1.A6 | 164.25,55.25 163.75,55.25 J1.B6 | 164.25,55.25 166,57 166,62.75 164,62.75 157,55.75 157,49.75 156.5,49.25 D1.6
EPD_3V3  (via drill 0.3)
  Top 0.3: v120.75,45.75 120.5,46 120.5,46.5 C7.1 | 81.25,14.5 80.75,14.5 J3.16 | 84.25,19.5 83.25,19.5 83.25,31 | 84.25,19.5 84.75,19.5 85.5,20.25 85.5,20.5 86.5,20.5 C18.1 | 83.25,31 83.25,31.25 84.53,32.53 84.53,33.22 84.5,33.25 84.5,38 | v81.25,15.25 81.25,14.5 | 84.25,19.5 v84.25,18 | 81.25,14.5 J3.15 | v59.25,31 47.75,31 TP7.TP | 83.25,31 v83,31 | v82.75,41.5 84.5,39.75 84.5,38 | 84.5,38 L1.2
  Bottom 0.3: Q3.2 134.25,39.75 134.25,40.75 125.75,40.75 v120.75,45.75 120.75,43.75 117.5,40.5 83.75,40.5 v82.75,41.5 | v81.25,15.25 82.75,16.75 83,16.75 v84.25,18 | v83,31 v59.25,31
EPD_3V3_C  (via drill 0.3)
  Top 0.3: v156.25,42.75 156.25,43.5 R11.1 | v15.5,45.25 15.5,52.5 20,57 20,59.5 U1.18 | v11,40.75 10.25,40 10.25,36.75 TP20.TP
  Bottom 0.3: v156.25,42.75 154.25,40.75 136.25,40.75 136.25,39.75 Q3.1 136,39.5 136,38.75 83.5,38.75 77.75,44.5 18.5,44.5 17.75,43.75 17,43.75 v15.5,45.25 v11,40.75
EPD_BUSY  (via drill 0.3)
  Top 0.15: v85.75,16.5 85.75,16.25 84.25,14.75 84.25,14.5 J3.9 | v8,3 5.5,5.5 5.5,41 6.25,41.75 v6.25,45.5 | v9.75,49 9.75,59.5 U1.26 9.75,59.75 9.75,60.5 8.75,61.5 8.75,74.75 10.25,74.75 11.5,73.5 11.5,73.25 17,73.25 TP11.TP
  Bottom 0.15: v85.75,16.5 86.5,15.75 87.5,15.75 87.75,15.5 87.75,14 72.75,14 69,10.25 69,3 v8,3 | v9.75,49 v6.25,45.5
EPD_CS  (via drill 0.3)
  Top 0.15: v81.75,16.5 82.75,15.5 82.75,14.5 J3.12 | v55.75,16.25 55.25,15.75 54.5,15.75 TP12.TP | v17.5,60.75 21.25,64.5 21.25,106 R24.1 | v17.75,54 20,51.75 20,42.25 U1.11 20,42 20,41 19.5,40.5 19.5,36.25 28.75,27 D11.2 29.8,26.84 30.45,26.19 30.45,25.3 v31,24.75
  Bottom 0.15: v81.75,16.5 81.5,16.25 78.75,16.25 78.25,16.75 74.5,16.75 74.03,16.28 67.89,16.28 67.86,16.25 v55.75,16.25 47.45,24.55 31.81,24.55 31.61,24.75 v31,24.75 | v17.5,60.75 17.5,54 v17.75,54
EPD_DC  (via drill 0.3)
  Top 0.15: 87,13 88.75,13 v88.75,14.5 | 87,13 84,13 83.25,13.75 83.25,14.25 J3.11 | v90.75,16.25 115,40.5 115,44.5 TP18.TP | v32.5,2.5 32.5,10 12.75,29.75 12.75,42 U1.5 | 87,13 v87,12
  Bottom 0.15: v88.75,14.5 90.5,16.25 v90.75,16.25 | v32.5,2.5 33.5,1.5 69.5,1.5 73.5,5.5 73.5,11.25 86.25,11.25 v87,12
EPD_RST  (via drill 0.3)
  Top 0.15: v83,17.5 83.75,16.75 83.75,14.5 J3.10 | v63.75,16.75 52.75,5.75 52.75,1.75 52.5,1.5 8.5,1.5 8.5,3.5 6,6 6,17 | 6,17 14.75,25.75 TP19.TP | v11,46.5 11,51.25 16,56.25 16,59.25 16.25,59.5 U1.21 | v6.25,41 6,40.75 6,17
  Bottom 0.15: v83,17.5 82.5,17 80.75,17 80.5,16.75 79.25,16.75 78.75,17.25 73,17.25 72.5,16.75 v63.75,16.75 | v11,46.5 6.25,41.75 v6.25,41
FLASH_CS  (via drill 0.3)
  Top 0.15: v68.5,34.75 68.5,34.25 73,34.25 R23.1 | v51.25,43.25 42.25,52.25 34.25,52.25 | 34.25,52.25 34.25,51.5 U6.1 | v14.25,79.5 14.25,97.75 14,98 D10.2 | v25.75,68 34.25,59.5 34.25,55.75 | 34.25,52.25 34.25,55.75 | 34.25,55.75 21.75,43.25 21.75,42.5 21.5,42.25 U1.12
  Bottom 0.15: v68.5,34.75 60,43.25 v51.25,43.25 | v25.75,68 v14.25,79.5
GDR  (via drill 0.3)
  Top 0.15: v87.75,13.5 87.75,14.25 J3.2 87.75,14.5 87.75,15 89,15 89.25,14.75 89.25,14.25 103.5,14.25 121.5,32.25 121.5,35.25 123.25,37 123.25,44.75 124.75,44.75 R17.1 | TRANSIST.1 66.25,17.5 66.25,17.11 68.31,15.05 69.7,15.05 v73,11.75
  Bottom 0.15: v87.75,13.5 86,11.75 v73,11.75
GND  (via drill 0.3, 0.35)
  Top 0.15: J2.G3 2,82 2.75,82.75 2.75,95 J2.G4 3,95.25 4.25,96.5 4.25,107 5.75,108.5 8.25,108.5 8.25,99.5 C9.2 | 84.75,11.5 80.5,11.5 80.5,13.5 80.25,13.75 80.25,14.25 J3.17 | 84.75,11.5 87.25,11.5 87.5,11.75 89,11.75 J3.MP1 | 73.5,12 75.5,12 J3.MP2 | 73.5,12 73.5,12.25 71.25,14.5 71.25,15.5 R4.1 | U1.29_5 13.25,49.5 13.25,50.5 U1.29_6 | C22.2 88.25,21.5 89,20.75 89,19 84.75,14.75 84.75,14.5 J3.8 84.75,14.25 v84.75,13.5 | J1.MP3 164.25,49.5 168,49.5 J1.MP1 168.25,49.5 168.25,59.5 J1.MP2 | J1.MP4 164,59.5 163.75,59.25 163.75,58 J1.A12 | 73.5,12 73.5,11.5 73.25,11.25 71.75,11.25 71.75,11.5 71.25,12 68,12 68,11 SJ1.1 | v84.75,12.5 84.75,11.5 | C12.2 83.91,33.09 v84,33 | v87,32 87,33.37 D3.1
  Top 0.152: U3.7 153.1,19.9 v153,20 | v150,18 150,18.46 TP5.TP 150.54,19 v146,19 | CAP3.- 134.98,29 v136,29 | J1.MP3 163.55,50.02 J1.A1 162,49.66 162,47 v164,45 | U4.6 148.75,47.25 149,47 v148.5,46.5 149,46 v149,44 | v154,46 153.88,46 C26.2 | U4.1 137.75,48.25 v136,50 | v133,50 134.31,48.69 C2.2 | v160,44 158.38,44 158.01,44.36 157.64,44.36 157,45 v156,45 | J5.1 161.72,21.72 161,21 v161,20 | v157,22 157.71,21.29 U3.1 | IC2.3 123.77,32.23 124,32 v123.5,31.5 | v118,32 118.71,32.71 C1.2 | C20.2 82.34,22.66 v82,23 | v84,23 84.26,22.74 C21.2 | C23.2 90,21.84 90,23 v89,24 | v87,23 88.05,21.95 C22.2 C18.2 | U7.13 84.23,60.98 84.23,60.69 85,59.92 v85,58 | v89,57 93,57 v93,56 | v96,50 95.2,50.8 C30.1 | TP4.TP 65.82,76.82 64,75 64,74 v65,73 | v86,66 86,64.53 D7.1 | U$2.2 52.08,107.32 C4.2 55,106.48 v55,105 | U$2.1 48,107 48,106 v49,106 | J3.MP2 75,12.49 v75,13 | v80,13 80,13.5 80.25,13.75 | U$3.1 23.68,106.32 24,106 v24,104 | v27,105 27,106 26.68,106.32 U$3.2 | v20,99 19,98 18.99,98.01 D10.1 12,101.46 v12,102 | v9,101 9,99.91 C9.2 | J2.G4 2.97,91.03 v3,91 | J2.G3 1.97,66.03 2,66 v2,65 | v7,67 8,66 8,63 v7,63 | v7,61 7,59.99 U1.28 | R6.1 32,21.87 v32,21 | v32,25 32,25.41 D8.1 31.47,25.53 v31,26 | U1.29_7 14.41,44.59 16,43 v16.5,43.5 | v16,40 v18,38 | v22,37 21.39,37 R9.1 | U1.29_2 U1.29_1 11.91,46.09 v13,45 | D11.1 29.34,25.34 v30,26 | v7,41 7,41.61 U1.1
  Top 0.3: C14.2 71,19.75 72.5,19.75 C15.2 76.25,19.75 | 80.5,21.75 78.75,21.75 C16.2 78.5,21.75 77.25,21.75 76.5,21 76.5,19.75 76.25,19.75 | 154.5,11.25 154,11.75 154,13.75 153,13.75 C13.2 | 154.5,11.25 166,11.25 166,20.5 168,22.5 168,40 158.75,49.25 158.75,50 158.25,50.5 C11.2 | v76.25,10.75 76.25,19.75 | 154.5,11.25 v154.25,11
  Bottom 0.15: v84.75,13.5 v84.75,12.5 | v84,33 86,33 v87,32
  Bottom 0.152: v153,20 151,18 v150,18 | v136,29 136,26 143,19 v146,19 | v149,44 153,44 154,45 | 154,45 v154,46 | v136,50 v133,50 | v164,45 163,44 v160,44 | v156,45 155,46 154,45 | v161,20 160,20 158,22 v157,22 | v123.5,31.5 119.5,31.5 119,31 v118,32 | v82,23 v84,23 | v89,24 88,23 v87,23 | v85,58 88,58 v89,57 | v93,56 93,50 v96,50 | v65,73 77,73 84,66 v86,66 | v49,106 47,104 31,104 27.88,107.12 C6.2 | v75,13 v80,13 | v27,105 26,105 25,104 v24,104 24,103 v20,99 | v12,102 11,101 v9,101 | v3,91 5,91 5.62,91.62 J2.P6 | v2,65 4,67 v7,67 | v7,63 v7,61 | v32,21 33,22 33,23 33.36,23.36 R3.2 | v32,25 34,25 D12.1 | v16.5,43.5 16.5,40.5 v16,40 | v18,38 20,36 21,36 v22,37 | v55,105 63,105 63.67,105.67 U$1.1 | v30,26 v31,26 | v13,45 9,41 v7,41
  Bottom 0.3: v76.25,10.75 76.5,10.5 92.25,10.5 97.5,5.25 97.5,4.25 147.5,4.25 v154.25,11
  other vias: 27.88,107.36 5.62,92.22 33.83,23.36 34.33,25.34 63.67,107.16
  pour Top: 69.93,17.8 69.93,16.59 96.54,16.59 96.56,16.57 96.58,16.55 96.6,16.53 96.6,5.16 166.29,5.16 166.29,58.34 90.15,58.34 90.13,58.36 90.11,58.38 90.09,58.4 90.09,105.33 88.88,105.33 88.86,105.35 88.84,105.37 88.82,105.39 88.82,109.14 6.43,109.14 6.43,5.16 69.77,5.16 69.77,17.8 69.79,17.82 69.81,17.84 69.83,17.86 69.87,17.86 69.89,17.84 69.91,17.82
  pour Bottom: 166.29,5.16 166.29,58.34 90.15,58.34 90.13,58.36 90.11,58.38 90.09,58.4 90.09,107.87 5.16,107.87 5.16,3.89 68.5,3.89 68.5,16.53 68.52,16.55 68.54,16.57 68.56,16.59 97.81,16.59 97.83,16.57 97.85,16.55 97.87,16.53 97.87,5.16
GPIO8  (via drill 0.3)
  Top 0.15: v70.25,12.5 70.25,13 69.75,13.5 R5.2 | v17.25,39.75 18.75,41.25 18.75,42 U1.10
  Bottom 0.15: v70.25,12.5 61.25,3.5 5,3.5 4.75,3.75 4.75,27.25 v17.25,39.75
I2C_PW  (via drill 0.3)
  Top 0.15: 156,19 156.75,19 156.75,19.5 157,19.75 157.5,19.75 U3.2 | 156,19 v155.75,19 155,19 U3.6 | 156,19 156,20.75 155,20.75 U3.8 | 85.5,21 85,20.5 84.5,20.5 C21.1 | 85.5,21 87.25,21 88,20.25 C22.1 88.25,20.25 88.25,19.5 v88.5,19.25 | v24.75,53 21.75,56 21.75,59.25 21.5,59.5 U1.17 | v84.75,47.5 85.5,46.75 85.5,22.5 85,22 85,21.5 85.5,21
  Bottom 0.15: v24.75,53 28.25,49.5 82.75,49.5 v84.75,47.5 | v155.75,19 141.5,4.75 103,4.75 v88.5,19.25
INT_RTC  (via drill 0.3)
  Top 0.15: 81.75,63 81.5,62.75 81.5,54.5 82.25,53.75 82.25,52.5 U7.3 | 81.75,63 82.25,63.5 R27.1 | v15,75.25 13.5,75.25 TP22.TP | 81.75,63 v79.5,65.25
  Bottom 0.15: v15,75.25 25,65.25 v79.5,65.25
IO/BOOT  (via drill 0.3)
  Top 0.15: 54.25,101.25 C24.1 | 52,109.5 53.5,109.5 55.45,107.55 55.45,104.81 54.25,103.61 54.25,101.25 | 52,109.5 52,109 U$2.3 | v156,13.75 155,13.75 R14.2 | 54.25,101.25 v54.5,101 | U$2.4 49,109.5 52,109.5 | v24.75,66.25 24.75,59.75 24,59.75 U1.15
  Bottom 0.15: v156,13.75 162.25,20 167,20 167.75,20.75 167.75,65.5 140.25,65.5 140,65.75 89.75,65.75 57,98.5 | v54.5,101 57,98.5 | 57,98.5 v24.75,66.25
IO/CHANGE  (via drill 0.3)
  Top 0.15: v134,42.75 130.75,42.75 R16.2 | 151.75,46.25 v151.5,46 | 151.75,46.25 C26.1 | 67,109.5 64.5,109.5 63.75,108.75 U$1.4 63.5,108.75 63.5,109.5 v62.75,109.5 | 67,109.5 67,108.75 U$1.3 | v20.75,74.75 14,68 14,59.75 U1.23 | 151.75,46.25 151.5,46.5 151.5,53.75 v140.5,64.75 | v90.5,65.25 90.5,105.5 86.5,109.5 67,109.5
  Bottom 0.15: v134,42.75 137.25,46 v151.5,46 | v20.75,74.75 54.5,108.5 61.75,108.5 v62.75,109.5 | v140.5,64.75 140,65.25 v90.5,65.25
MISO  (via drill 0.3)
  Top 0.15: 6.75,93.5 6.5,93.25 6,93.25 J2.P7 | 6.75,93.5 7,93.75 7,94.75 10.25,98 R22.1 | v29.5,50.25 34,50.25 U6.2 | v9.25,58.25 8.75,58.75 8.75,59.5 U1.27 8.5,59.75 8.5,60.5 6,63 6,85.25 7.75,87 7.75,92.5 6.75,93.5 | v84,54 86.5,56.5 86.5,62.75 87,63.25 87,64 87.25,64.25 D7.2 | v79.75,50 52,22.25 45.5,22.25 TP8.TP
  Bottom 0.15: v9.25,58.25 14,53.5 26.25,53.5 v29.5,50.25 29.75,50 v79.75,50 80,50 v84,54
MOSI  (via drill 0.3)
  Top 0.15: J2.P3 5.75,88.75 4.75,87.75 4.75,63.75 6,62.5 6,60.5 6.75,59.75 6.75,58.75 9.25,56.25 9.25,47.25 13.25,43.25 15,43.25 15,42.25 U1.7 15.25,42 15.25,39.75 28,27 28,25 28.75,24.25 29,24.25 29.25,24.5 30.5,24.5 30.75,24.25 33,24.25 33,26.25 | TP9.TP 30.5,48 31,47.5 31,41.25 35.25,41.25 R21.1 35.5,41 35.5,40.5 | 35.5,40.5 37.5,40.5 38.25,41.25 38.25,43.75 42,47.5 U6.5 | v80.25,17.25 81.75,15.75 81.75,14.5 J3.14 | 32,27.25 33,26.25 | 33,26.25 v33.25,26 | 35.5,40.5 34.75,39.75 34.75,30.5 32,27.75 32,27.25 | 32,27.25 D8.2
  Bottom 0.15: v80.25,17.25 77.5,20 75.25,20 69.25,26 v33.25,26
N$1  (via drill 0.3)
  Top 0.15: v67.5,55.5 44,32 44,22.25 34,22.25 R3.1 | v99.5,62.25 v97,59.75 | v164.25,62.25 165.5,61 165.5,57.25 164.5,56.25 163.75,56.25 J1.B5
  Bottom 0.15: v67.5,55.5 71.5,59.5 92.75,59.5 93,59.75 v97,59.75 | v164.25,62.25 v99.5,62.25
N$2  (via drill 0.3)
  Top 0.15: v29.5,24 29.5,23.5 28.75,23.5 R2.2 | v55.5,26.5 80.25,51.25 80.25,55.25 v80,55.5 | v166.5,59.75 166.75,59.5 166.75,55.25 164.75,53.25 163.75,53.25 J1.A5
  Bottom 0.15: v29.5,24 32,26.5 v55.5,26.5 | v80,55.5 83.5,59 92.75,59 93,59.25 97.25,59.25 97.75,59.75 v166.5,59.75
N$3
  Top 0.15: C8.1 87.5,49.5 87.5,38 D4.1 87.5,37.75 87.5,37.25 88.5,36.25 88.5,34 90.75,34 D3.2
N$11  (via drill 0.3)
  Top 0.15: v72.5,17.5 72.5,15.75 R4.2 | v72.5,22 76.25,25.75 76.25,30.5 D2.2 76.5,30.75 76.5,31.25 77,31.75 77,34.75 76.25,35.5 Q1.1
  Bottom 0.15: v72.5,22 v72.5,17.5
N$13  (via drill 0.3)
  Top 0.15: IC1.1 48,103.25 47.5,103.25 47,102.75 47,101.5 48,101.5 IC1.3 48.25,101.25 68,81.5 v68,42.25 | v151.25,4.75 151.25,11.75 151.5,12 C3.1 | v95.5,3.75 93.5,5.75 v93.5,10 | v73.5,24 74,24.5 74,30.5 D2.1 74.25,30.75 75.5,30.75 75.5,32.5 76.25,33.25 Q1.2 76.25,34 v75.5,34.75
  Bottom 0.15: v151.25,4.75 150.25,3.75 v95.5,3.75 | v93.5,10 89.5,14 88.5,14 88.25,14.25 88.25,16.25 86.75,16.25 82.5,20.5 77,20.5 v73.5,24 | v75.5,34.75 v68,42.25
N$22  (via drill 0.3)
  Top 0.15: v127.75,47.75 127.75,44.75 126.75,43.75 126.75,36.25 IC2.5 | v138.75,58.75 139.25,59.25 139.25,65 140.25,66 v140.5,66 | v69.75,108.25 68.75,107.25 C25.1
  Bottom 0.15: v138.75,58.75 v127.75,47.75 | v140.5,66 140.25,66.25 91.75,66.25 90.5,67.5 90.5,108.25 v69.75,108.25
N$23  (via drill 0.3)
  Top 0.15: v91.75,108.25 91.75,66.75 106.5,66.75 124.5,48.75 LED1.C | v61.5,109.75 62,109.25 62,108.75 R10.2
  Bottom 0.15: v91.75,108.25 89.25,110.75 62.5,110.75 v61.5,109.75
N$24  (via drill 0.3)
  Top 0.15: v90.75,63.75 90.75,64.25 62.25,92.75 62.25,107.25 R10.1 | v119.25,61.75 130.5,50.5 130.5,46 131,45.5 131.5,45.5 U2.1
  Bottom 0.15: v90.75,63.75 92.75,61.75 v119.25,61.75
N$25  (via drill 0.3)
  Top 0.15: v34.25,39 20.75,39 R9.2 | v127.25,37.5 129,39.25 129,45.5 U2.5
  Bottom 0.15: v34.25,39 39,34.25 76.25,34.25 79.5,37.5 v127.25,37.5
N$26  (via drill 0.3)
  Top 0.15: v116.5,38 114.25,35.75 R12.2 | v157.25,42.75 157.5,42.5 157.5,42 R13.2
  Bottom 0.15: v116.5,38 116.75,38.25 152.75,38.25 v157.25,42.75
N$28  (via drill 0.3)
  Top 0.15: v86.25,15.25 86.25,14.5 J3.5 | v85,16.25 82.5,18.75 82.5,20.25 C20.1
  Bottom 0.15: v86.25,15.25 85.25,16.25 v85,16.25
N$29  (via drill 0.3)
  Top 0.15: v166.75,20.5 166.75,3.75 96.25,3.75 95.25,4.75 95.25,10.5 80,10.5 76.75,13.75 76.75,14.25 J3.24 | v160.25,46.5 158.25,48.5 158.25,49 C11.1
  Bottom 0.15: v166.75,20.5 166.75,46.5 v160.25,46.5
N$30
  Top 0.15: J3.4 86.75,14.5 86.75,15.5 90.5,19.25 91.25,19.25 91.25,20.25 C19.1
N$32
  Top 0.15: J3.22 77.75,14.25 77.75,13.75 80.5,11 95.75,11 95.75,4.75 96.25,4.25 152.75,4.25 152.75,12.25 C13.1
N$40  (via drill 0.3)
  Top 0.15: v97.25,58.25 92.75,53.75 R18.2 | v130.75,58.75 135.25,54.25 135.25,44.5 134.5,43.75 134.5,37.5 135.75,36.25 135.75,34.75 135,34 135,33.5 D13.1
  Bottom 0.15: v97.25,58.25 97.75,58.75 v130.75,58.75
N$41  (via drill 0.3)
  Top 0.15: v78.25,15.25 78.25,14.5 J3.21 | v70.25,15.75 70.75,16.25 70.75,18.25 C14.1
  Bottom 0.15: v78.25,15.25 77.75,15.75 v70.25,15.75
N$42  (via drill 0.3)
  Top 0.15: v78.75,15.75 78.75,14.5 J3.20 | v74.75,16.25 72.75,18.25 C15.1
  Bottom 0.15: v78.75,15.75 78.25,16.25 v74.75,16.25
N$43
  Top 0.15: J3.19 79.25,14.5 79.25,19.5 78.75,20 78.75,20.25 C16.1
N$44
  Top 0.15: J3.18 79.75,14.5 79.75,19.25 80.5,20 80.5,20.25 C17.1
PREVGH  (via drill 0.3)
  Top 0.3: D5.1 80.25,43.75 80.25,43.25 82.35,41.15 82.35,35.4 82.75,35 | 86.5,21.75 v85.5,21.75 | 80.75,22.25 v81,22.5 81,33.25 82.75,35 | 82.75,35 83,34.75 83,33.25
  Bottom 0.3: v81,22.5 81.75,22.5 81.78,22.47 84.78,22.47 v85.5,21.75
PREVGL  (via drill 0.3)
  Top 0.3: v77.25,21 77.25,14.5 J3.23 | v82.25,26 82.25,33 C12.1 | v90.75,34.75 90.75,37.75 D4.2
  Bottom 0.3: v77.25,21 v82.25,26 82.25,26.25 v90.75,34.75
RESE  (via drill 0.3, 0.35)
  Top 0.15: v87.25,15.25 87.25,14.5 J3.3 | v68.75,15.75 67.5,17 67.5,17.5 TRANSIST.2
  Top 0.152: R8.1 70.11,9 v65,9 | v68.5,15.5 v68.75,15.75
  Bottom 0.15: v87.25,15.25 86.75,14.75 69.75,14.75 v68.75,15.75
  Bottom 0.152: v65,9 65,13 68,16 v68.5,15.5
RESE'  (via drill 0.3)
  Top 0.15: v52.25,2 32.75,21.5 32.75,23.5 31.75,23.5 R6.2 | v71.75,10.5 71,11.25 R8.2 70.75,11 69.5,11 SJ1.2
  Bottom 0.15: v52.25,2 69.5,2 71.75,4.25 v71.75,10.5
RESET  (via drill 0.3)
  Top 0.15: 25.25,107.75 26.25,107.75 U$3.3 | 25.25,107.75 23,107.75 U$3.4 | v10.25,43.25 10.25,42.5 10,42.25 U1.3 | v20.75,48.25 25.25,52.75 25.25,107.75 | v90.75,19.75 90.25,20.25 C23.1 90,20.25 89,21.25 89,22.25 86.25,25 86.25,39.75 v86,40 | IC2.1 123.75,36 123.25,36 123,35.75 123,35.5 v122.75,35.25 122.75,28.25 143.5,28.25 152.25,19.5 152.25,18.25 156.75,13.75 R15.2
  Bottom 0.15: v10.25,43.25 15.25,48.25 v20.75,48.25 22.5,46.5 79.75,46.5 82.32,43.93 82.32,41.32 83.5,40.15 85.85,40.15 v86,40 | v90.75,19.75 104.25,33.25 120.75,33.25 v122.75,35.25
RTC_RST  (via drill 0.3)
  Top 0.15: v23,58.25 23,59.25 22.75,59.5 U1.16 | v82.25,55 83.5,53.75 83.5,52.5 U7.4
  Bottom 0.15: v23,58.25 26.25,55 v82.25,55
RX  (via drill 0.3)
  Top 0.15: v12.75,60.75 12.75,59.75 U1.24 | v139.75,64.75 151,53.5 151,30.25 TP2.TP
  Bottom 0.15: v12.75,60.75 16.75,64.75 v139.75,64.75
SCK  (via drill 0.3)
  Top 0.15: U6.6 42,49 40.75,47.75 40.75,47 37.5,43.75 37.5,43.25 D9.2 37.25,43 v36.25,43 | v82.25,13.5 82.25,14.25 J3.13 | v39,2.5 34,7.5 34,8.5 TP10.TP 33.75,8.75 33.75,9.25 27.5,15.5 27.5,27 14,40.5 14,40.75 | v73,13.5 71.75,14.75 71.75,19 70.25,19 70,19.25 70,30 74.25,34.25 R20.1 | 14,40.75 14,42 U1.6 | v7,89.25 7,91 6,91 J2.P5 | 14,40.75 v13.75,40.75
  Bottom 0.15: v82.25,13.5 81,12.25 73,12.25 | 73,12.25 72.75,12.25 69.5,9 69.5,2.5 v39,2.5 | 73,12.25 v73,13.5 | v7,89.25 4.75,87 4.75,69.89 7.45,67.19 7.45,66.81 5.25,64.61 5.25,61.5 5.75,61 5.75,40.25 11.5,40.25 12,40.75 v13.75,40.75 14.86,40.75 15.88,39.72 16.11,39.72 17.14,40.75 34,40.75 v36.25,43
SCL  (via drill 0.3)
  Top 0.15: 140.75,47.75 150.25,47.75 v150.25,37.75 | 140.75,47.75 U4.7 | v161,27 161.5,26.5 J5.4 | v159.25,25 159.25,18.25 157.75,18.25 U3.4 | v18.25,60.75 18,60.5 18,60 17.75,59.75 U1.20 | v78.75,60.75 79.5,61.5 79.5,61.75 U7.16 | v140.75,62.75 140.75,47.75
  Bottom 0.15: v150.25,37.75 v161,27 161,26.75 v159.25,25 | v18.25,60.75 v78.75,60.75 82.25,64.25 139.25,64.25 v140.75,62.75
SDA  (via drill 0.3)
  Top 0.15: v158.75,23.5 158.75,19 157.75,19 U3.3 | v160.5,25.25 161.5,25.25 J5.3 161.75,25.25 167.25,25.25 v167.25,40 | v135.75,60.25 135.75,52.25 139.75,48.25 U4.8 | v81,60 81,61.75 U7.15 | v19.25,58.25 19.25,59.25 19,59.5 U1.19
  Bottom 0.15: v160.5,25.25 v158.75,23.5 | v19.25,58.25 21,60 v81,60 90.5,60 90.75,60.25 v135.75,60.25 167.25,60.25 v167.25,40
SRC  (via drill 0.3)
  Top 0.15: 83.75,44.75 83.75,44 D5.2 | 83.75,44.75 83.75,47.25 85,48.5 85,50.5 88,50.5 88.75,49.75 C8.2 | v69.5,20 67,20 TRANSIST.3 | v72,20.75 80,28.75 | 83.75,44.75 79.25,44.75 79.25,41.5 80,40.75 80,38 L1.1
  Top 0.152: 80,28.75 80,34 81,35 82,35 82,37 81,38 80,38
  Bottom 0.15: v69.5,20 70.25,20.75 v72,20.75
SS_SD  (via drill 0.3)
  Top 0.15: v33,27 34.25,27 D12.2 | v12.25,40.25 11.25,41.25 U1.4 11.25,42.25 11,42.5 11,45 7.25,48.75 v7.25,57.5 | v46,108.25 46,107.25 47,107.25 R25.1 | v7.25,88.5 6.75,88 6.25,88 J2.P2
  Bottom 0.15: v46,108.25 27,108.25 v7.25,88.5 7.25,67.78 7.73,67.3 7.73,66.7 7.45,66.42 7.45,60.81 7.25,60.61 v7.25,57.5 | v12.25,40.25 14.96,40.25 15.77,39.45 16.23,39.45 16.96,40.18 19.82,40.18 v33,27
TX
  Top 0.15: U1.25 11.25,59.75 11,60 11,72.25 10.25,73 TP1.TP
USB_D+  (via drill 0.3)
  Top 0.15: v153.5,50.25 153.5,49.5 153.75,49.25 D1.1 | v35.5,50.5 34.75,49.75 28.75,49.75 28.75,46.75 24,42 U1.14
  Bottom 0.15: v153.5,50.25 144.5,59.25 97.75,59.25 97.25,58.75 93,58.75 88.75,54.5 39.5,54.5 v35.5,50.5
USB_D-  (via drill 0.3)
  Top 0.15: v144.75,61.25 152,54 152,49 153,48 153,47.5 153.75,47.5 D1.3 | v90.5,61.25 90.5,59.25 85.25,54 85.25,51.25 v77.75,43.75 | v23.5,43.75 22.75,43 22.75,42.25 U1.13
  Bottom 0.15: v90.5,61.25 v144.75,61.25 | v23.5,43.75 v77.75,43.75
VBAT  (via drill 0.3)
  Top 0.3: TP3.TP 136,43.25 v136,47.75 U4.2 U4.3 | C27.1 111.25,37.25 111.25,37.5 114.5,40.75 v114.5,41 | v131.25,48.25 131.5,48 131.5,47.5 U2.3
  Bottom 0.3: v136,47.75 135.5,48.25 v131.25,48.25 130,47 120.75,47 114.75,41 v114.5,41
VBUS  (via drill 0.3)
  Top 0.3: 155.25,48.25 156.25,48.25 D1.5 | 155.25,48.25 155.25,41.5 157.25,39.5 158,39.5 R_SPEC.2 | LED1.A 126.25,48.5 129,48.5 129,47.5 U2.4 129.25,47.25 129.25,47 130,46.25 130,44.75 132.5,44.75 133,45.25 133,47 134.25,47 C2.1 | v6,108 6,98 8.25,98 C9.1 | LED1.A 126,48.75 126,49.25 v108.5,66.75 140.5,66.75 155.25,52 155.25,48.25 | LED1.A 126,48.5 126,48 121,43 121,32.75 C1.1 120.75,32.5 120.75,32.25 v104.5,16 | v87.75,19.5 86.25,18 TP21.TP
  Bottom 0.3: v6,108 7,109 61.5,109 62.75,110.25 89,110.25 91.75,107.5 91.75,66.75 v108.5,66.75 | v87.75,19.5 88.25,20 88.5,20 92.5,16 v104.5,16
VRTC  (via drill 0.3)
  Top 0.3: C29.1 117.25,34.25 117.25,44.5 108.25,53.5 95.25,53.5 95.25,53.75 C30.2 93.75,52.5 93.75,52.25 R18.1 92,52.25 v88.75,55.5 | U7.14 82.25,61.75 82.25,60 84.78,57.47 85.28,57.47 v86,56.75
  Bottom 0.3: v86,56.75 87.25,55.5 v88.75,55.5
VUSB  (via drill 0.3)
  Top 0.3: 163.5,52.25 163.5,52 J1.A4 | 163.5,57 163.5,56.75 J1.B4 | 162.5,52.25 163.5,52.25 | 162.5,52.25 162.5,56.75 162.75,57 163.5,57 | 163.5,52.25 J1.B9 | 163.5,57 J1.A9 | 162.5,52.25 160.75,50.5 v160.75,48 | v154.25,41.5 153.75,41 153.75,39.5 R_SPEC.1
  Bottom 0.3: v154.25,41.5 v160.75,48
(copper drawn outside any net)
  shapes: Top area x14